# Altium PCB ALLOCHIS_ADAPTER_panelizado.PcbDoc
Units mm, origin at the board's own origin, x right, y up, seen from the top; angles counter-clockwise.
Board outline 180.5 x 180.5 mm, 4 copper layers (Top Layer, VCC3V3, GND, Bottom Layer), stack 1.579 mm thick; 3 components, 0 nets, 0 pads, 0 vias.
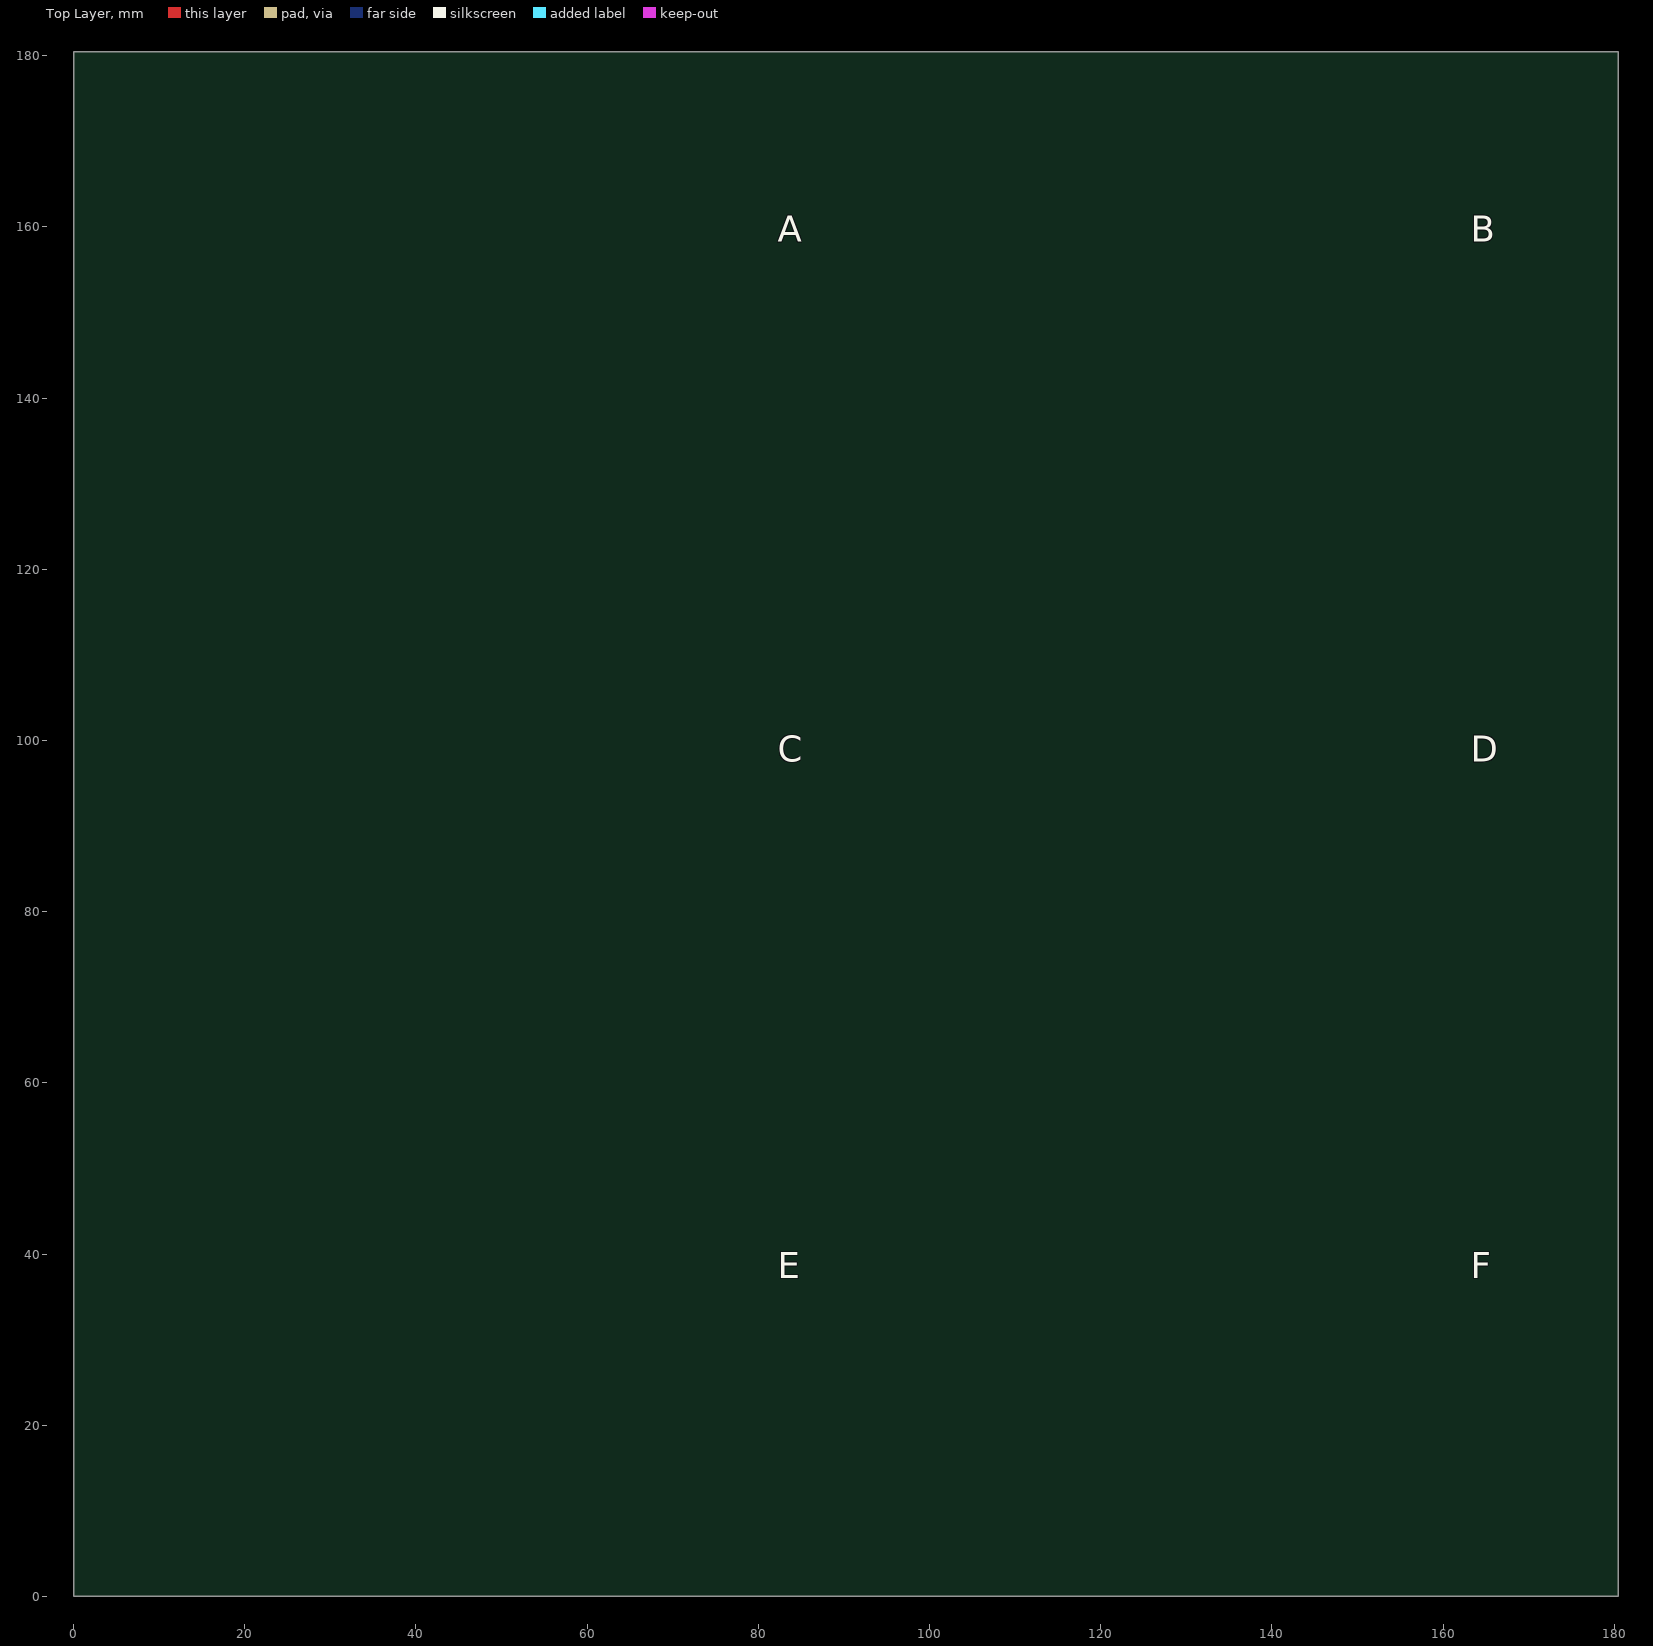
[diagram p0: Top Layer view]
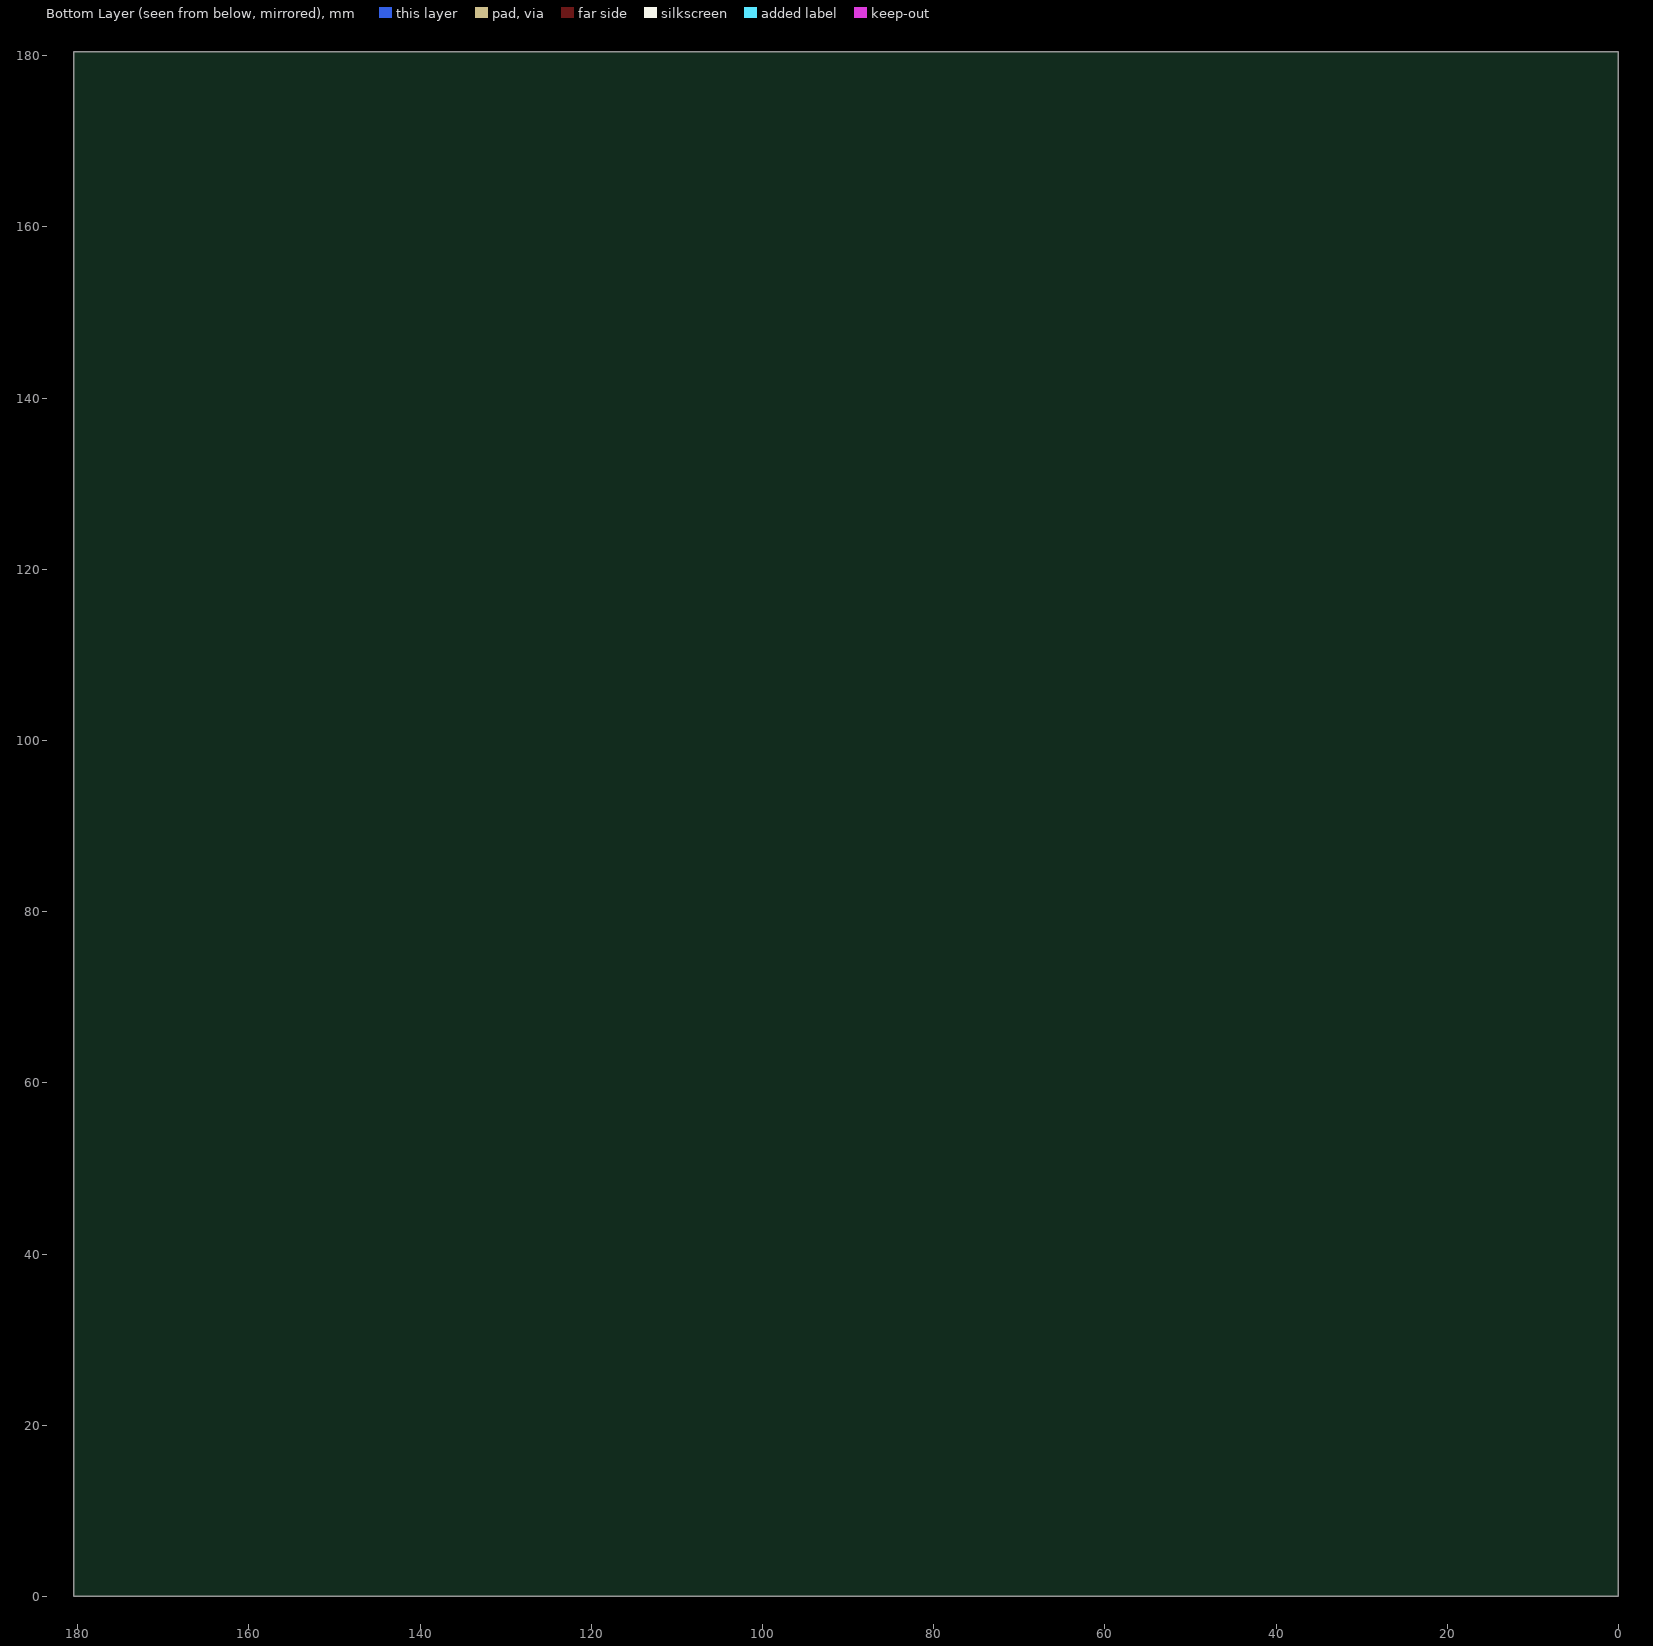
[diagram p1: Bottom Layer view, seen from below]
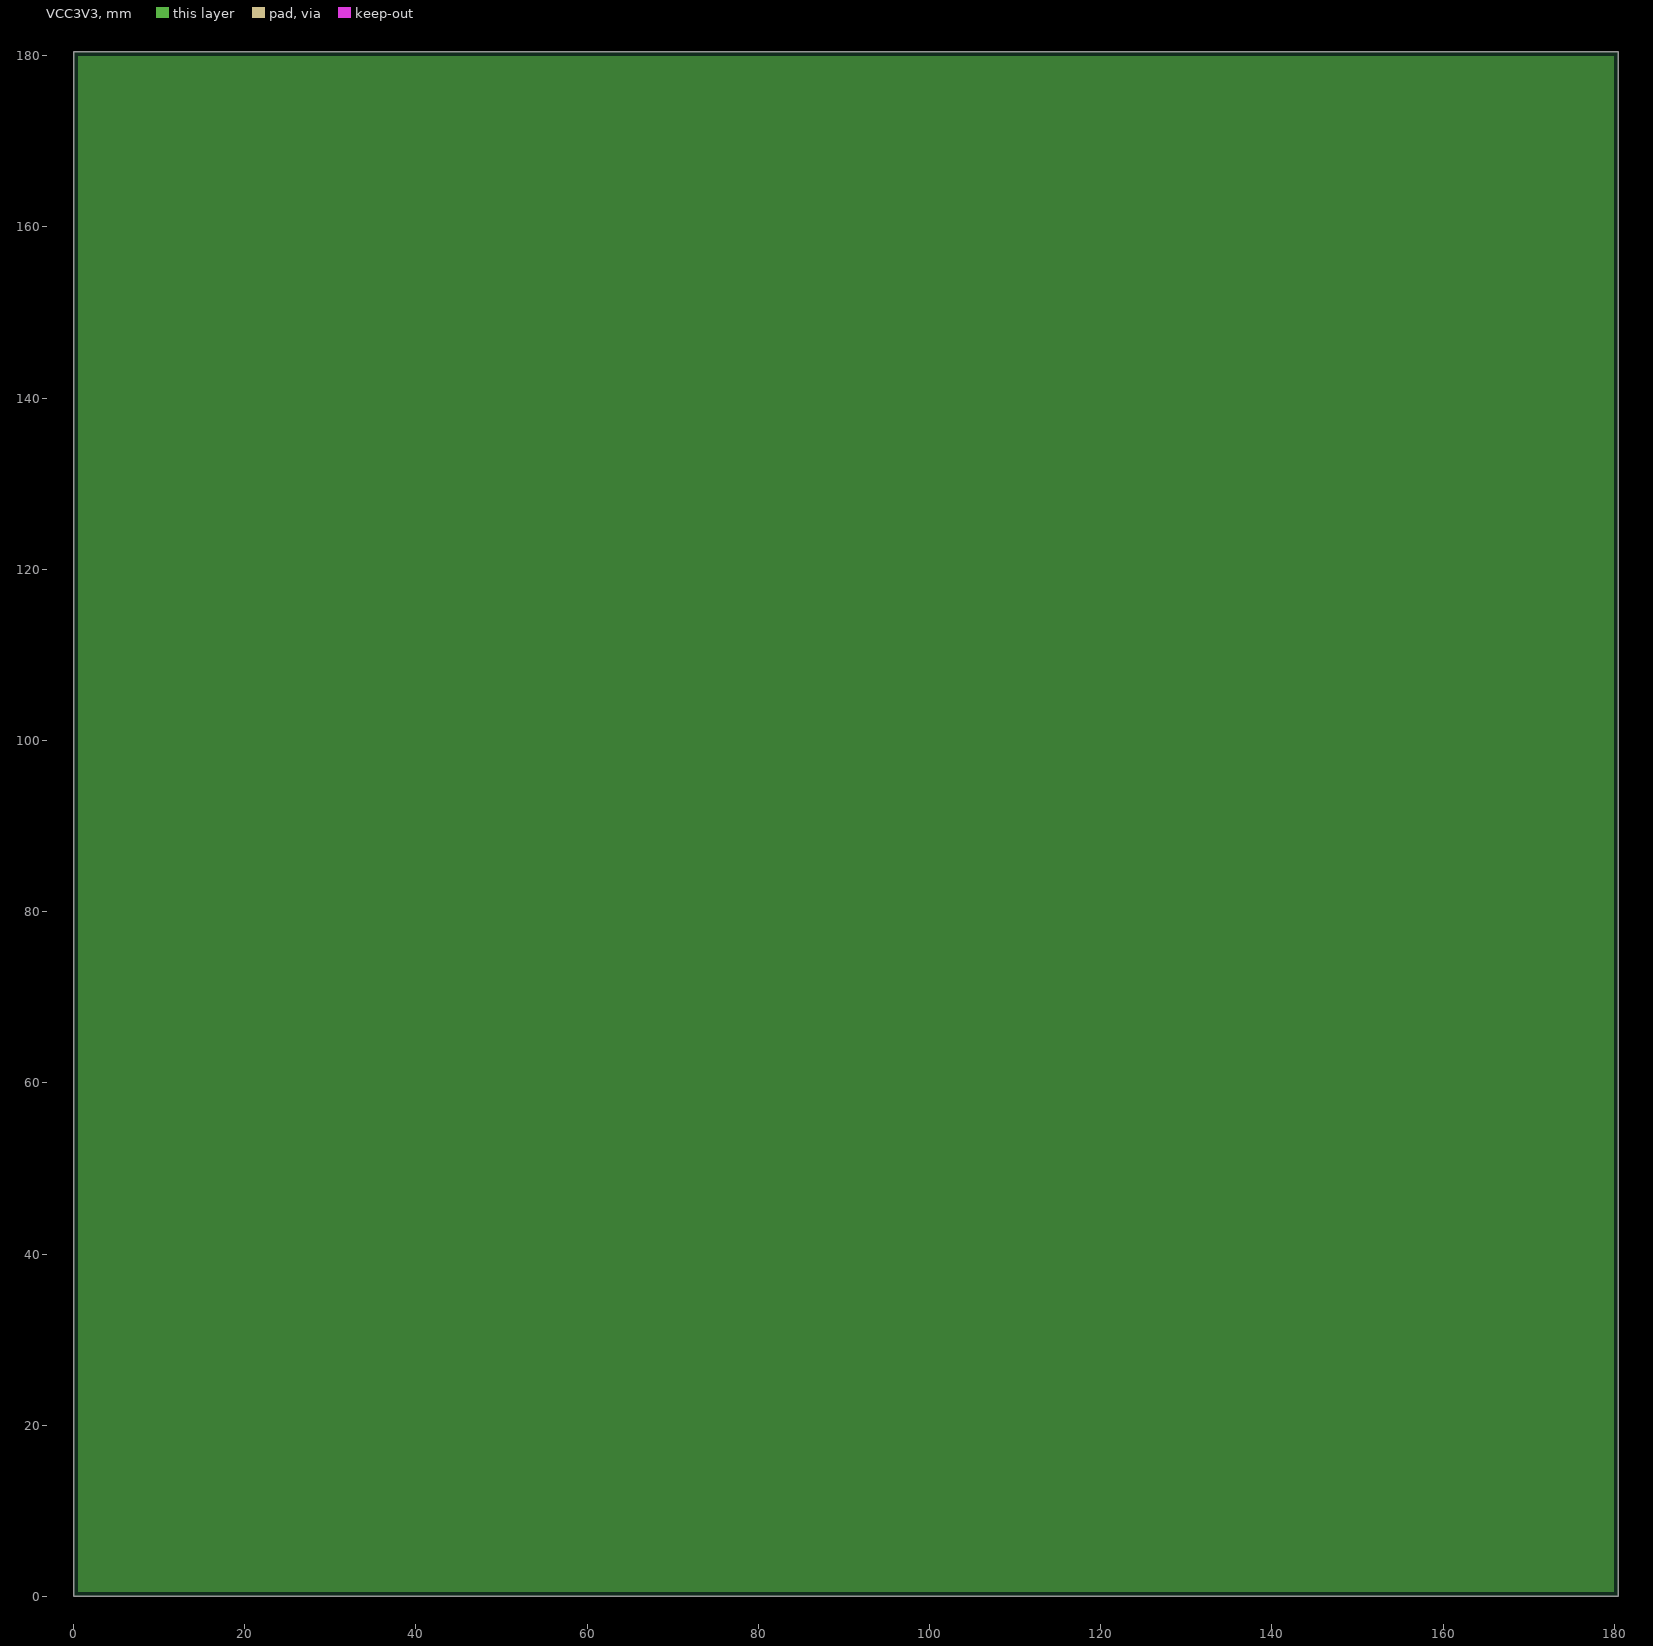
[diagram p2: VCC3V3, clearances drawn from the general rule]
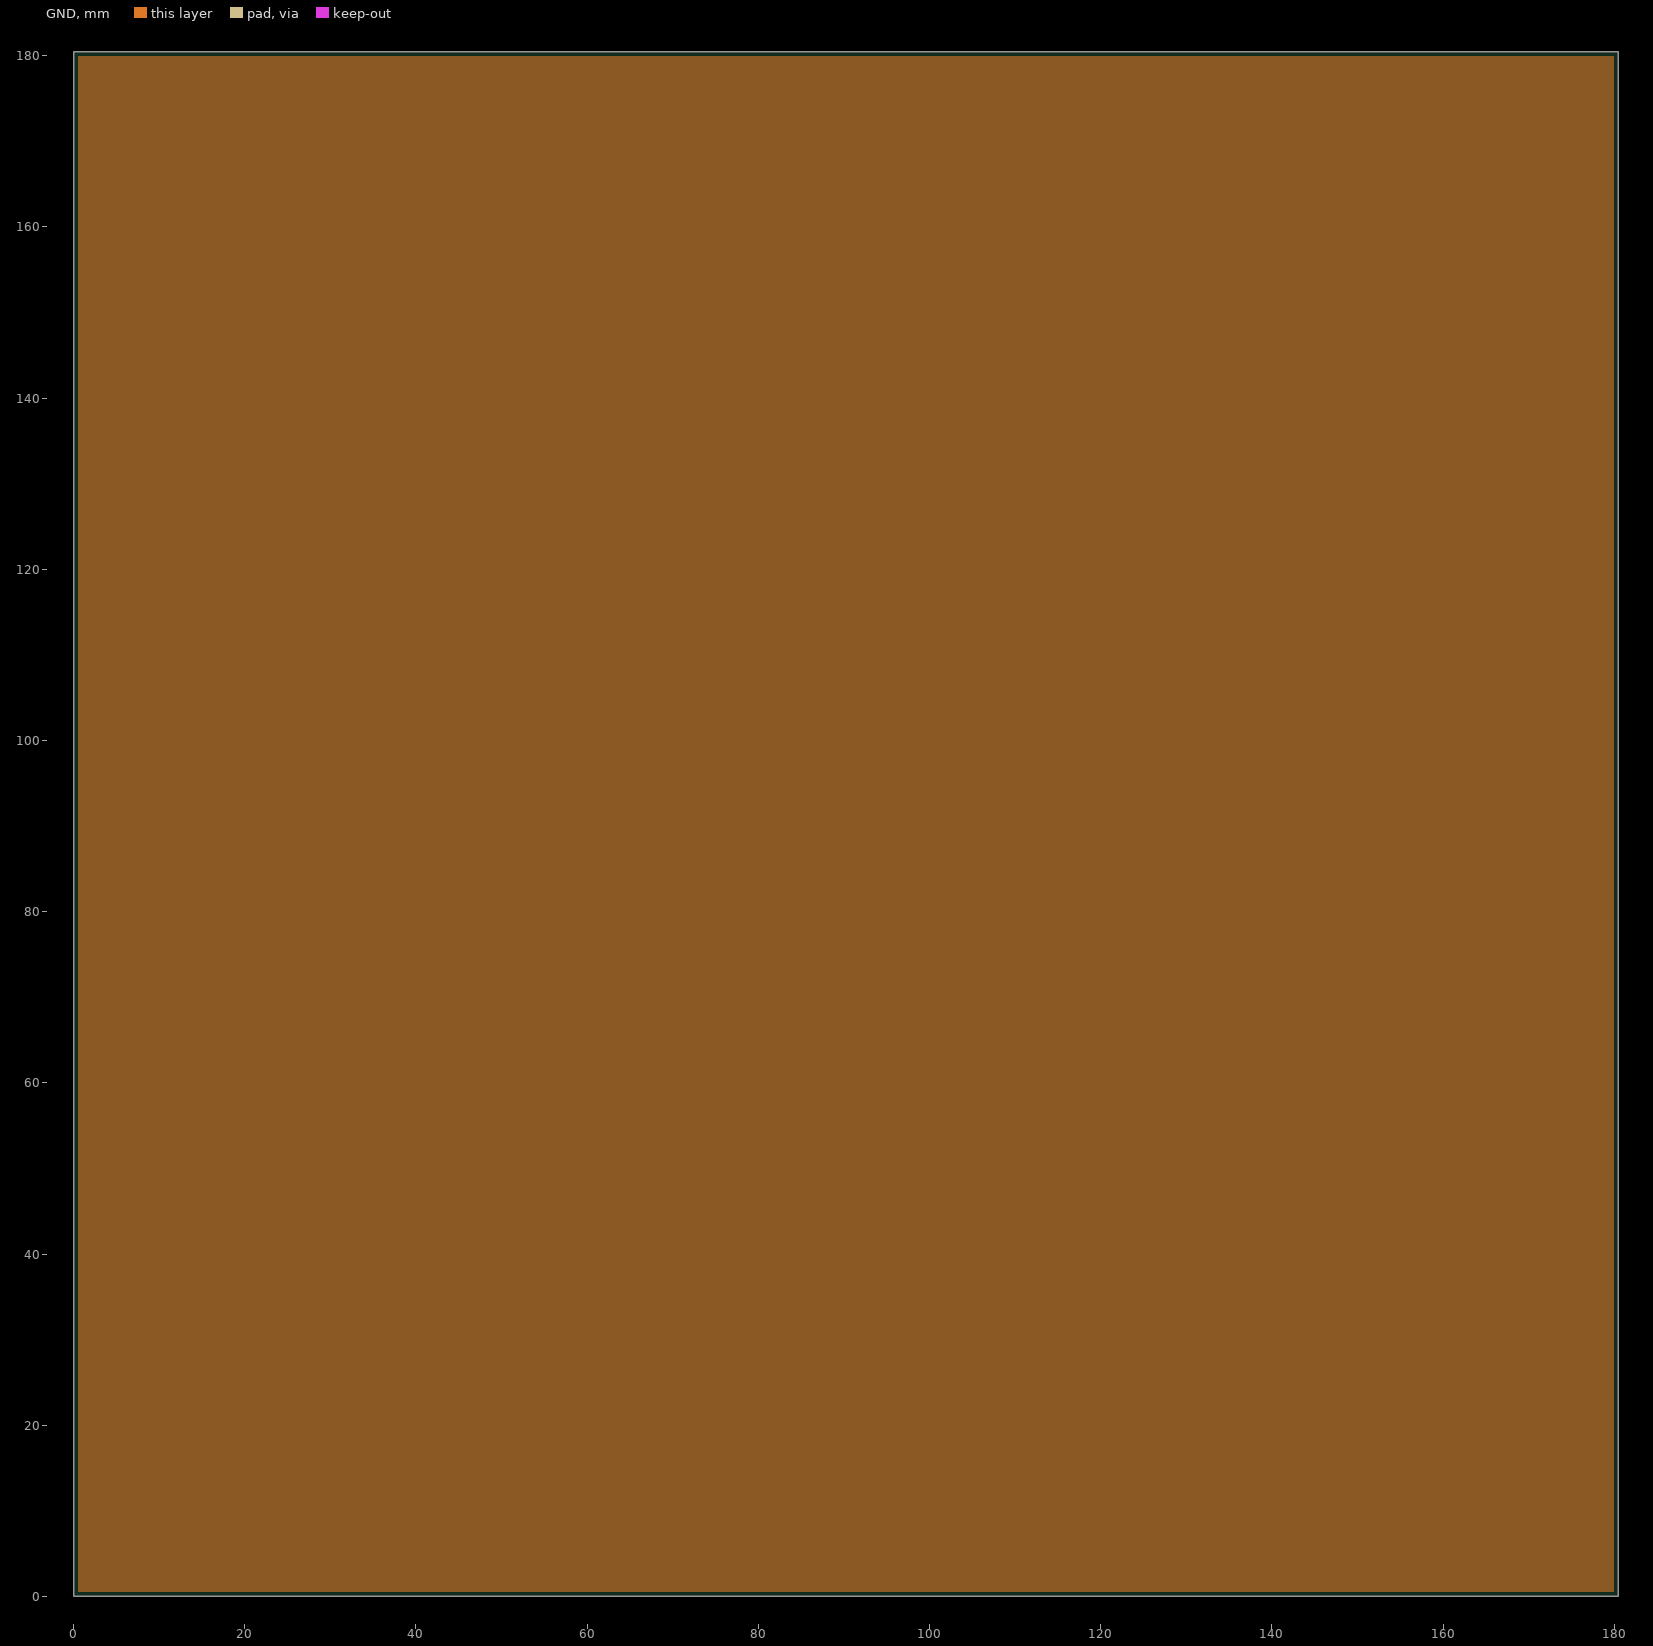
[diagram p3: GND, clearances drawn from the general rule]

## Layer stack, top to bottom
Top Solder: solder mask 0.0127, Solder Resist, Dk 3.5
Top Layer: signal copper 0.0347
Dielectric 1: prepreg 0.195, 7628, Dk 4.2
VCC3V3: plane copper 0.035
Dielectric 2: core 1.05, FR-4, Dk 4.2
GND: plane copper 0.035
Dielectric 3: prepreg 0.195, 7628, Dk 4.2
Bottom Layer: signal copper 0.0347
Bottom Solder: solder mask 0.0127, Solder Resist, Dk 3.5

## Board outline
0,0 0,180.5 180.5,180.5 180.5,0

## Design rules (kind name [scope] priority, off if disabled: settings)
Clearance [All] p1: gap=0.254 ignorepadtopadclearanceinfootprint=FALSE except(0: Arc-Hole Track-Hole SMDPad-Hole THPad-Hole Via-Hole Fill-Hole Poly-Hole Region-Hole Text-Hole)
PlaneClearance [All] p1: clearance=0.508
PlaneConnect [All] p1: planeconnectstyle=Relief reliefexpansion=0.508 reliefentries=4 reliefconductorwidth=0.254 reliefairgap=0.254
PolygonConnect [All] p1: connectstyle=Relief reliefconductorwidth=0.254 reliefentries=4 polygonreliefangle="90 Angle" airgapwidth=0.254
RoutingVias [All] p1: holewidth=0.711 width=1.27 viastyle="Through Hole" minholewidth=0.711 minwidth=1.27 maxholewidth=0.711 maxwidth=1.27
SolderMaskExpansion [All] p1: expansion=0.102
Width [All] p1: maxlimit=0.254 minlimit=0.254 preferedwidth=0.254
28 further rules are at their usual default settings.

## Components (designator, comment, footprint, x,y, rotation, side; value= is the part's Value field where it differs from the comment)
AssemblyNotes "AssemblyNotes" ASSNOTES -176.4,66.55 r0 top
"Fabrication Notes" "FabricationNotes" FABNOTES -176.4,249.775 r0 top
"Title Block" "FormatBlock_A2" FormatBlock_A2 -194.15,-134.35 r0 top

## Footprints (in the part's own frame and the unit in brackets; to place one, negate y for a bottom-side part, rotate by r counter-clockwise, add the part's x,y. Pads: shape width x height; smd on the part's side, far side on the other; paste and mask are expansions set on the pad)
ASSNOTES [mm]
FABNOTES [mm]
FormatBlock_A2 [mm]

## Part data
AssemblyNotes: "Assembly Notes", N1_Item1="ASSEMBLE THE BOARD ACCORDING TO THE REQUIREMENTS OF IPC-A-610.", N1_Item2="THIS ASSEMBLY CONTAINS ELECTROSTATIC DISCHARGE. (ESD) SENSITIVE DEVICES;  STATIC-FREE HANDLING IS REQUIRED PER IPC-A-610.", N1_Item3="DESIGNATIONS ARE FOR REFERENCE ONLY AND DO NOT APPEAR ON INDIVIDUAL PARTS.", N1_Item4="ORIENTATION OF POLARIZED COMPONENTS (E.G., POLARIZED CAPACITORS) ARE DENOTED BY A POARITY INDICATOR ON THE PCB OR BY THE MANUFACTURER'S DESCRIPTION. POLARITY IS IDENTIFIED ON THE PART.", N1_Item5="SOME OF THE COMPONENTS ARE NOT INSTALLED (DNP) - REFER TO THE BOM.", N1_Item6="THIS PCB SHALL BE ASSEMBLED T0 MEET EU RoHS REGULATIONS (DIRECTIVE 2002/95/EC OF THE EUROPEAN PARLIAMENT AND OF THE COUNCIL OF 27 JANUARY 2003 ON THE RESTRICTION OF THE USE OF CERTAIN HAZARDOUS SUBSTANCES IN ELECTRICAL AND ELECTRONIC EQUIPMENT).", N1_Item7="COMPONENTS USED TO ASSEMBLE THIS PCB MUST WITHSTAND THE HIGHER TEMPERATURE REQUIREMENTS OF A RoHS ASSEMBLY PROCESS.", N1_Item8="REFERENCE DRAWINGS: ENSURE LATEST REVISION."
"Fabrication Notes": "Fabrication Notes", N2_Item1="FABRICATE BOARD IN ACCORDANCE WITH IPC-2221 CLASS 2, LEVEL B. OTHER APPLICABLE STANDARDS AND SPECIFICATIONS: IPC-A-22, IPC-T-50, IPC-L-109. INTERPRET ALL DIMENSIONS IN ACCORDANCE WITH ANSI-Y14.5.", N2_Item2="PRODUCIBILITY: BOARD FABRICATOR HAS THE RESPONSIBILITY TO CONDUCT A REVIEW OF THE FILES AND/OR MEDIA FOR MANUFACTURABILITY IN THEIR PROCESS AND CONFORMANCE TO ALL APPLICABLE SPECIFICATIONS. PLANTIUM MUST BE ADVISED IN WRITING (IN ADVANCE OF CHANGES, REVISIONS OR CORRECTIONS MADE OR RECOMMENDATIONS TO ENSURE CONFORMANCE TOMANUFACTURE) OF ANY SPECIFIED STANDARDS, AND OF ANY SPECIFICATIONS THAT CANNOT BE MET.", N2_Item3="CORE MATERIAL: LAMINATE GLASS FIBER EPOXY, FLAME RETARDENT PER IPC-4101 TYPE GF 140 or 170 DEGREE Tg SIZE AND CONSTRUCTION IN ACCORDANCE WITH SECTION A-A. 1 OR 2 OZ COPPER ON EXTERNAL AND 1 OR 2 OZ ON INTERNAL LAYERS PLATED.", N2_Item4="BONDING MATERIAL: PREPREG (B-STAGE) TYPE GF PER IPC-4101.", N2_Item5="APPLY FABRICATION ID AND/OR LOGO, UL MARKING AND DATE CODE, 4 DIGITS WEEK/YEAR IN SILKSCREEN ONLY IN CLEAR AREA OF THE BOARD, AT LEAST 50MILS AWAY FROM ANY FEATURE, ON EITHER THE PRIMARY OR SECONDARY SIDE OF PCB.", N2_Item6="BOARD CONSTRUCTION: SOLDER MASK OVER BARE COPPER (SMOBC) USING LIQUID PHOTOIMAGEABLE MATERIAL (LPI). APPLY TO BOTH EXTERNAL LAYERS IN ACCORDANCE WITH IPC-SM-840. USE APPROPRIATE SOLDER MASK ARTWORK FOR EACH SIDE OF BOARD.", N2_Item7="SOLDER MASK MISREGISTRATION SHALL NOT EXCEED +/-0.002 INCH. SOLDER MASK OVERLAP IS PERMITTED ON ALL CIRCULAR LANDS BUT SHALL NOT EXCEED 0.001 IN. NO SOLDER MASK MATERIAL PERMISSIBLE ON SMD LAND PATTERNS.", N2_Item8="SOLDER MASK THICKNESS 0.0004 IN. MIN. / 0.002 IN. MAX LPI SOLDER MASK MATERIAL IS TO BE DARK GREEN IN COLOR GLOSS FINISH AND HIGHLY TRANSPARENT.", N2_Item9="DRILL BOARDS USING N/C DRILL DATA AND HOLE SCHEDULE ON FABRICATION DRAWING. NO BREAKOUT PERMISSIBLE.", N2_Item10="ALL HOLES ARE PLATED-THROUGH UNLESS OTHERWISE NOTED. MINIMUM COPPER PLATING IN PLATED HOLES TO BE 0.001 INCH.", N2_Item11="MINIMUM ANNULAR RING 0.006 IN. NO BREAKOUT PERMISSIBLE.", N2_Item12="PCB FINISH IS ELECTROLESS NICKEL IMMERSION GOLD (ENIG).", N2_Item13="FINISHED LINE WIDTH TOLERANCE IS +/- 20%.", N2_Item14="MINIMUM FINISHED SPACING TO BE 0.005 IN.", N2_Item15="DIMENSIONS ARE AFTER ETCHING AND PLATING AND ARE BASIC UNLESS OTHERWISE NOTED. TOLERANCES ARE NON-CUMULATIVE.", N2_Item16="BOW AND TWIST SHALL NOT EXCEED 0.75%.", N2_Item17="SILKSCREEN TOP SIDE OF BOARD USING NON-CONDUCTIVE, WHITE EPOXY BASE INK. USE APPROPRIATE ARTWORK FOR EACH SIDE.", N2_Item18="LAYER TO LAYER REGISTRATION TO BE +/- 0.005 INCH NON-CUMULATIVE.", N2_Item19="LAYER CONFIGURATION: SEE DETAIL A-A ; FINISHED BOARD THICKNESS: SEE DETAIL A-A.", N2_Item20="FINISHED BOARD TO CONFORM TO IPC-A-600.", N2_Item21="ALL FILM (ARTWORK) EITHER PROVIDED BY PLANTIUM OR GENERATED BY VENDOR ARE TO BE DELIVERED WITH FINISHED BOARDS.", N2_Item22="ELECTRICAL TEST: ALL BOARDS SHALL BE 100% ELECTRICALLY TESTED FOR OPENS (GREATER THAN 1 OHM) WITH A TEST CURRENT OF 0.01 AMPS. SHORTS (LESS THAN 1 MEGOHMS) WITH A TEST VOLTAGE OF 10.0 VOLTS.", N2_Item23="VENDOR WILL PROVIDE APPROPRIATE QUALITY COMPLIANCE.", N2_Item24="DESIGNED IN FABRICATION ALLOWANCE IS 0.001 INCH.", N2_Item25="THE FIDUCIALS SHOULD BE VISIBLE ON THE PASTE SCREEN.", N2_Item26="THIS IS A NOT CONTROLLED IMPEDANCE PCB:  CAN lines, etc, trace length < 2000 mils, USB components not populated", N2_Item27="CAN ALTER INIDIVIDIAL LAYER THICKNESS. ENSURE PCB BALANCE AND FINISHED PCB DIMINSION AS INDICATED.", N2_Item28="STENCIL THICKNESS IS 4 MILS."
"Title Block": "Fill this block's parameters to complete the text shown in the PCB file (Title Block)", PartNumber=10113AAB001, Approved=GS, Drawn=LE, HW_Version=0.0.1, ProjectTitle="ADAPTER BOARD", RevDate=16-Jun-23, RevDescription="Baby Board - ALLOCHIS isoBUS"

## Nets (pads, with @x,y where several pads share a name; then routed paths per layer and width w, separated by ;. In a path a pad name is that pad's centre, name@x,y a point inside that pad or via, vN(x,y) a via of type N, cw(c..) or ccw(c..) an arc to the next point about the centre after c; other vN are vias at no path point)

## Polygon pours and split planes (outlines as drawn)
no net on VCC3V3 (split plane): 179.99,0.51 0.51,0.51 0.51,179.99 179.99,179.99
no net on GND (split plane): 179.99,0.51 0.51,0.51 0.51,179.99 179.99,179.99

## Silkscreen, mask and mechanical layers (free items; w line width, h text height)
Top Overlay:
  text "A" at 82.25,158.25 h3.05
  text "B" at 163.25,158.25 h3.05
  text "C" at 82.25,97.55 h3.05
  text "D" at 163.25,97.55 h3.05
  text "E" at 82.25,37.15 h3.05
  text "F" at 163.25,37.15 h3.05
Mechanical 11:
  drawing of 295 lines, arcs and shapes, not listed
  text "Layer" at 54.478,250.381 h1.52
  text "Name" at 64.89,250.381 h1.52
  text "Material" at 88.506,250.381 h1.52
  text "Thickness" at 110.344,250.381 h1.52
  text "Constant" at 126.85,250.381 h1.52
  text "Board Layer Stack" at 141.324,250.381 h1.52
  text "1" at 54.478,247.333 h1.52
  text "Top Overlay" at 64.89,247.333 h1.52
  text "2" at 54.478,244.285 h1.52
  text "Top Solder" at 64.89,244.285 h1.52
  text "Solder Resist" at 88.506,244.285 h1.52
  text "0.013mm" at 110.344,244.285 h1.52
  text "3.5" at 126.85,244.285 h1.52
  text "3" at 54.478,241.237 h1.52
  text "Top Layer" at 64.89,241.237 h1.52
  text "Copper" at 88.506,241.237 h1.52
  text "0.035mm" at 110.344,241.237 h1.52
  text "4" at 54.478,238.189 h1.52
  text "Dielectric 1" at 64.89,238.189 h1.52
  text "7628" at 88.506,238.189 h1.52
  text "0.195mm" at 110.344,238.189 h1.52
  text "4.2" at 126.85,238.189 h1.52
  text "5" at 54.478,235.141 h1.52
  text "VCC3V3" at 64.89,235.141 h1.52
  text "Copper" at 88.506,235.141 h1.52
  text "0.035mm" at 110.344,235.141 h1.52
  text "6" at 54.478,232.093 h1.52
  text "Dielectric 2" at 64.89,232.093 h1.52
  text "FR-4" at 88.506,232.093 h1.52
  text "1.050mm" at 110.344,232.093 h1.52
  text "4.2" at 126.85,232.093 h1.52
  text "7" at 54.478,229.045 h1.52
  text "GND" at 64.89,229.045 h1.52
  text "Copper" at 88.506,229.045 h1.52
  text "0.035mm" at 110.344,229.045 h1.52
  text "8" at 54.478,225.997 h1.52
  text "Dielectric 3" at 64.89,225.997 h1.52
  text "7628" at 88.506,225.997 h1.52
  text "0.195mm" at 110.344,225.997 h1.52
  text "4.2" at 126.85,225.997 h1.52
  text "9" at 54.478,222.949 h1.52
  text "Bottom Layer" at 64.89,222.949 h1.52
  text "Copper" at 88.506,222.949 h1.52
  text "0.035mm" at 110.344,222.949 h1.52
  text "10" at 54.478,219.901 h1.52
  text "Bottom Solder" at 64.89,219.901 h1.52
  text "Solder Resist" at 88.506,219.901 h1.52
  text "0.013mm" at 110.344,219.901 h1.52
  text "3.5" at 126.85,219.901 h1.52
  text "11" at 54.478,216.853 h1.52
  text "Bottom Overlay" at 64.89,216.853 h1.52
Drill Drawing:
  circle w0.254: c297.844,227.662 r0.847
  lines w0.254: 296.997,203.955 296.997,204.378 297.421,204.802 296.997,205.225 296.997,205.648 297.421,205.648 297.844,205.225 298.267,205.648 298.691,205.648 298.691,205.225 298.267,204.802 298.691,204.378 298.691,203.955 298.267,203.955 297.844,204.378 297.421,203.955 296.997,203.955 ; 296.997,208.612 297.844,207.765 298.691,208.612 297.844,209.458 296.997,208.612 ; 296.997,211.998 297.421,211.998 297.421,211.575 298.267,211.575 298.267,211.998 298.691,211.998 298.691,212.845 298.267,212.845 298.267,213.268 297.421,213.268 297.421,212.845 296.997,212.845 296.997,211.998 ; 296.997,217.078 298.691,217.078 297.844,215.385 296.997,217.078 ; 296.997,219.195 298.691,219.195 298.691,220.888 296.997,220.888 296.997,219.195 ; 296.997,223.005 297.844,223.428 298.691,223.005 298.267,223.852 298.691,224.698 297.844,224.275 296.997,224.698 297.421,223.852 296.997,223.005
  lines w0.381: 295.479,202.812 367.139,202.812 ; 295.479,229.482 367.139,229.482 ; 309.471,199.002 309.471,233.292 ; 324.707,199.002 324.707,233.292 ; 353.147,199.002 353.147,233.292 ; 295.479,199.002 367.139,199.002 367.139,233.292 295.479,233.292 295.479,199.002
  text "Symbol" at 297.765,230.625 h1.83
  text "Count" at 310.614,230.625 h1.83
  text "Hole Size" at 325.85,230.625 h1.83
  text "Plated" at 354.29,230.625 h1.83
  text "6" at 310.614,226.815 h1.52
  text "0.800mm (31.50mil)" at 325.85,226.815 h1.52
  text "NPTH" at 354.29,226.815 h1.52
  text "6" at 310.614,223.005 h1.52
  text "1.700mm (66.93mil)" at 325.85,223.005 h1.52
  text "NPTH" at 354.29,223.005 h1.52
  text "12" at 310.614,219.195 h1.52
  text "1.200mm (47.24mil)" at 325.85,219.195 h1.52
  text "NPTH" at 354.29,219.195 h1.52
  text "12" at 310.614,215.385 h1.52
  text "3.000mm (118.11mil)" at 325.85,215.385 h1.52
  text "NPTH" at 354.29,215.385 h1.52
  text "24" at 310.614,211.575 h1.52
  text "0.900mm (35.43mil)" at 325.85,211.575 h1.52
  text "PTH" at 354.29,211.575 h1.52
  text "24" at 310.614,207.765 h1.52
  text "3.000mm (118.11mil)" at 325.85,207.765 h1.52
  text "PTH" at 354.29,207.765 h1.52
  text "522" at 310.614,203.955 h1.52
  text "0.254mm (10.00mil)" at 325.85,203.955 h1.52
  text "PTH" at 354.29,203.955 h1.52
  text "606 Total" at 310.614,200.145 h1.52
Mechanical 25 (Mech25):
  the board outline again, w0.254
V-Scoring:
  lines w0.254: 0,60.255 180.5,60.25 ; 0,120.75 180.5,120.75 ; 9.75,0 9.75,180.5 ; 90.25,0 90.25,180.5 ; 170.75,0 170.75,180.5

## Dimensions
0,0 to 180.5,0 on Mechanical 16
0,0 to 0,180.5 on Mechanical 16
180.5,120.75 to 192.946,120.623 on Mechanical 11
180.5,60.25 to 192.946,60.123 on Mechanical 11
170.75,180.5 to 170.877,192.946 on Mechanical 11
9.75,180.5 to 9.877,192.946 on Mechanical 11
90.25,180.5 to 90.377,192.946 on Mechanical 11

## Panel: embedded boards
"ALLOCHIS_ADAPTER_v1.0.PcbDoc" at 10,0, 3 rows x 2 columns, spacing 60.5 x 80.5, rotation 0

## Text inside footprints (layer, text, board x,y; h text height)
AssemblyNotes: Mechanical 29 "8." at -181.838,26.778 h1.25; Mechanical 29 "7." at -181.838,31.808 h1.25; Mechanical 29 "3." at -181.5,52.75 h1.25; Mechanical 29 "6." at -181.584,39.323 h1.25; Mechanical 29 "5." at -181.584,42.881 h1.25; Mechanical 29 "4." at -181.584,49.408 h1.25; Mechanical 29 "1." at -181.33,60.186 h1.25; Mechanical 29 "2." at -181.584,57.474 h1.25; Mechanical 29 "ASSEMBLY NOTES:" at -180.343,66.101 h1.25
"Fabrication Notes": Mechanical 28 "28." at -182.593,77.538 h1.25; Mechanical 28 "25." at -182.593,91.773 h1.25; Mechanical 28 "22." at -182.593,109.794 h1.25; Mechanical 28 "21." at -182.593,115.89 h1.25; Mechanical 28 "20." at -182.593,120.258 h1.25; Mechanical 28 "19." at -182.593,126.354 h1.25; Mechanical 28 "7." at -182.593,193.106 h1.25; Mechanical 28 "6." at -182.593,201.437 h1.25; Mechanical 28 "5." at -182.593,209.666 h1.25; Mechanical 28 "27." at -182.593,82.75 h1.25; Mechanical 28 "26." at -182.593,88.213 h1.25; Mechanical 28 "23." at -182.593,100.557 h1.25; Mechanical 28 "24." at -182.593,96.036 h1.25; Mechanical 28 "18." at -182.593,130.622 h1.25; Mechanical 28 "17." at -182.593,136.718 h1.25; Mechanical 28 "15." at -182.593,149.418 h1.25; Mechanical 28 "13." at -182.593,157.546 h1.25; Mechanical 28 "14." at -182.593,153.482 h1.25; Mechanical 28 "11." at -182.593,165.978 h1.25; Mechanical 28 "12." at -182.593,161.914 h1.25; Mechanical 28 "10." at -182.593,172.278 h1.25; Mechanical 28 "9." at -182.593,178.374 h1.25; Mechanical 28 "8." at -182.593,184.774 h1.25; Mechanical 28 "4." at -182.593,213.934 h1.25; Mechanical 28 "3." at -182.593,222.265 h1.25; Mechanical 28 "2." at -182.593,234.965 h1.25; Mechanical 28 "1." at -182.593,243.297 h1.25; Mechanical 28 "16." at -182.593,143.118 h1.25; Mechanical 28 "FABRICATION NOTES:" at -180.372,249.214 h1.25
"Title Block": Mechanical 13 "A" at -198.157,246.44 h2; Mechanical 13 "C" at -198.257,127.286 h2; Mechanical 13 "B" at -198.033,186.178 h2; Mechanical 13 "D" at -198.033,69.033 h2; Mechanical 13 "1" at 356.611,277.027 h2; Mechanical 13 "2" at 299.835,276.979 h2; Mechanical 13 "E" at -198.133,11.033 h2; Mechanical 13 "F" at -198.133,-45.367 h2; Mechanical 13 "G" at -198.033,-107.667 h2; Mechanical 13 "G" at 389.39,-107.667 h2; Mechanical 13 "F" at 389.29,-45.367 h2; Mechanical 13 "E" at 389.29,11.033 h2; Mechanical 13 "D" at 389.39,69.033 h2; Mechanical 13 "B" at 389.39,186.178 h2; Mechanical 13 "C" at 389.166,127.286 h2; Mechanical 13 "A" at 389.266,246.44 h2; Mechanical 13 "4" at 182.611,277.027 h2; Mechanical 13 "5" at 124.611,277.027 h2; Mechanical 13 "6" at 66.611,277.027 h2; Mechanical 13 "7" at 8.611,277.027 h2; Mechanical 13 "8" at -49.389,277.027 h2; Mechanical 13 "9" at -107.389,277.027 h2; Mechanical 13 "3" at 240.611,277.027 h2; Mechanical 13 "10" at -165.55,277.05 h2; Mechanical 13 "10" at -165.55,-137.621 h2; Mechanical 13 "3" at 240.611,-137.621 h2; Mechanical 13 "9" at -107.95,-137.65 h2; Mechanical 13 "8" at -49.389,-137.621 h2; Mechanical 13 "7" at 8.611,-137.621 h2; Mechanical 13 "6" at 66.611,-137.621 h2; Mechanical 13 "5" at 124.611,-137.621 h2; Mechanical 13 "4" at 182.611,-137.621 h2; Mechanical 13 "2" at 298.65,-137.65 h2; Mechanical 13 "1" at 356.611,-137.621 h2; Mechanical 25 "DRAWN" at 352.315,267.065 h1.23; Mechanical 25 "DATE" at 376.445,267.065 h1.23; Mechanical 25 "APPROVED" at 360.951,267.065 h1.2; Mechanical 25 "DESCRIPTION" at 331.233,267.065 h1.23; Mechanical 25 "VERSION" at 313.763,266.966 h1.14; Mechanical 25 "REVISIONS HISTORY" at 339.993,271.777 h1.4; Mechanical 25 "(SEE NOTES)" at 276.369,-130.35 h2.03; Mechanical 25 "(SEE NOTES)" at 276.369,-119.35 h2.03; Mechanical 25 "DATE" at 239.358,-94.055 h1.2; Mechanical 25 "DATE" at 239.358,-85.114 h1.27; Mechanical 25 "DRAWN" at 215.863,-85.216 h1.27; Mechanical 25 "APPROVED" at 215.812,-94.207 h1.27; Mechanical 25 "USED FOR MANUFACTURING  OR  FOR ANY" at 217.87,-124.255 h1.27; Mechanical 25 "PROPRIETARY INFORMATION" at 221.197,-106.247 h1.78; Mechanical 25 "INFORMATION  WHICH  SHALL  NOT  BE" at 217.743,-114.324 h1.27; Mechanical 25 "THIS DOCUMENT CONTAINS PROPRIETARY" at 217.743,-111.124 h1.27; Mechanical 25 "DOCUMENTS OR DISCLOSED TO OTHERS OR" at 217.92,-121.03 h1.27; Mechanical 25 "PERMISSION OF PLANTIUM." at 217.87,-131.088 h1.27; Mechanical 25 "REPRODUCED OR TRANSFERRED TO OTHER" at 217.87,-117.702 h1.27; Mechanical 25 "OTHER PURPOSE WITHOUT THE PRIOR WRITTEN" at 217.793,-127.888 h1.27; Mechanical 25 "VERSION" at 375.993,-119.618 h1.2; Mechanical 25 "FILENAME:" at 309.818,-129.513 h1.2; Mechanical 25 "PART NUMBER" at 310.021,-119.506 h1.2; Mechanical 25 "FINISH:" at 264.455,-125.518 h1.66; Mechanical 25 "MATERIAL:" at 264.455,-114.883 h1.66; Mechanical 25 "TITLE" at 309.919,-109.181 h1.66; Mechanical 25 "-DIMENSIONS ARE IN MILLIMETERS" at 263.644,-90.769 h1.66; Mechanical 25 "UNLESS OTHERWISE SPECIFIED:" at 263.324,-87.1 h1.65; Mechanical 25 "-REMOVE ALL BURRS & BREAK" at 263.644,-93.698 h1.66; Mechanical 25 "SHARP EDGES" at 264.071,-96.043 h1.66; Mechanical 25 "-TOLERANCE ON:" at 263.644,-98.597 h1.66; Mechanical 25 "DECIMALS:" at 265.808,-101.472 h1.66; Mechanical 25 "XXX .005" at 265.808,-110.258 h1.66; Mechanical 25 "XX .01" at 265.808,-107.484 h1.66; Mechanical 25 "ANGLES:" at 296.476,-101.472 h1.66; Mechanical 25 "FRACTIONS:" at 280.603,-101.627 h1.66; Mechanical 25 "1/64" at 281.528,-104.864 h1.66; Mechanical 25 "X .02" at 265.808,-104.709 h1.66; Mechanical 25 "63" at 298.484,-108.101 h1.66; Mechanical 25 "1" at 299.871,-104.864 h1.66; Mechanical 25 "1" at 299.871,-104.864 h1.66; Mechanical 25 "Villa Constitucion, Santa Fe, CP 2919" at 310.62,-102.106 h1.94; Mechanical 25 "PHONE (03400) 47-4199" at 310.62,-105.531 h1.94; Mechanical 25 "PLANTIUM" at 341.127,-91.086 h2.54; Mechanical 25 "San Luis 279" at 310.714,-98.757 h1.94; Drill Guide "DRILL GUIDE" at 77.716,258.754 h6; Drill Guide "SHEET  3 OF 3" at 369.592,-132.15 h1.2; Drill Drawing "DRILL DRAWING" at 72.45,258.75 h6; Drill Drawing "SHEET  2 OF 3" at 369.591,-132.15 h1.2; Mechanical 20 "TOP ASSEMBLY DRAWING" at 57.389,258.754 h6; Mechanical 20 "2" at 381.581,-132.15 h1.2; Mechanical 22 "2" at -189.633,-132.15 h1.2; Mechanical 22 "BOTTOM ASSEMBLY DRAWING" at 168.508,258.754 h6; Mechanical 16 "PLANTIUM" at -148.629,-91.086 h2.54; Mechanical 16 "Villa Constitucion, Santa Fe, CP 2919" at -118.122,-102.106 h1.94; Mechanical 16 "San Luis 279" at -118.215,-98.757 h1.94; Mechanical 16 "PHONE (03400) 47-4199" at -118.122,-105.531 h1.94; Mechanical 16 "UNLESS OTHERWISE SPECIFIED:" at -70.826,-87.1 h1.65; Mechanical 16 "-DIMENSIONS ARE IN MILLIMETERS" at -71.146,-90.769 h1.66; Mechanical 16 "-REMOVE ALL BURRS & BREAK" at -71.146,-93.698 h1.66; Mechanical 16 "1" at -107.373,-104.864 h1.66; Mechanical 16 "1" at -107.373,-104.864 h1.66; Mechanical 16 "63" at -105.986,-108.101 h1.66; Mechanical 16 "X .02" at -73.309,-104.709 h1.66; Mechanical 16 "XX .01" at -73.309,-107.484 h1.66; Mechanical 16 "ANGLES:" at -103.978,-101.472 h1.66; Mechanical 16 "XXX .005" at -73.309,-110.258 h1.66; Mechanical 16 "DECIMALS:" at -73.309,-101.472 h1.66; Mechanical 16 "1/64" at -89.029,-104.864 h1.66; Mechanical 16 "FRACTIONS:" at -88.104,-101.627 h1.66; Mechanical 16 "SHARP EDGES" at -71.572,-96.043 h1.66; Mechanical 16 "-TOLERANCE ON:" at -71.146,-98.597 h1.66; Mechanical 16 "THIS DOCUMENT CONTAINS PROPRIETARY" at -25.244,-111.124 h1.27; Mechanical 16 "OTHER PURPOSE WITHOUT THE PRIOR WRITTEN" at -25.295,-127.888 h1.27; Mechanical 16 "PERMISSION OF PLANTIUM." at -25.371,-131.088 h1.27; Mechanical 16 "DOCUMENTS OR DISCLOSED TO OTHERS OR" at -25.422,-121.03 h1.27; Mechanical 16 "USED FOR MANUFACTURING  OR  FOR ANY" at -25.371,-124.255 h1.27; Mechanical 16 "INFORMATION  WHICH  SHALL  NOT  BE" at -25.244,-114.324 h1.27; Mechanical 16 "PROPRIETARY INFORMATION" at -28.699,-106.247 h1.78; Mechanical 16 "REPRODUCED OR TRANSFERRED TO OTHER" at -25.371,-117.702 h1.27; Mechanical 16 "(SEE NOTES)" at -83.871,-119.35 h2.03; Mechanical 16 "MATERIAL:" at -71.956,-114.883 h1.66; Mechanical 16 "FINISH:" at -71.956,-125.518 h1.66; Mechanical 16 "(SEE NOTES)" at -83.871,-130.35 h2.03; Mechanical 16 "FILENAME:" at -117.319,-129.513 h1.2; Mechanical 16 "PART NUMBER" at -117.523,-119.506 h1.2; Mechanical 16 "VERSION" at -183.494,-119.618 h1.2; Mechanical 16 "TITLE" at -117.421,-109.181 h1.66; Mechanical 16 "DATE" at -46.86,-85.114 h1.27; Mechanical 16 "DATE" at -46.86,-94.055 h1.2; Mechanical 16 "APPROVED" at -23.314,-94.207 h1.27; Mechanical 16 "DRAWN" at -23.365,-85.216 h1.27; Mechanical 16 "VERSION" at -120.998,266.712 h1.14; Mechanical 16 "DESCRIPTION" at -138.469,266.811 h1.23; Mechanical 16 "REVISIONS HISTORY" at -147.228,271.523 h1.4; Mechanical 16 "APPROVED" at -168.187,266.811 h1.2; Mechanical 16 "DRAWN" at -159.551,266.811 h1.23; Mechanical 16 "DATE" at -183.681,266.811 h1.23; Mechanical 14 "1" at -164.05,277.05 h2; Mechanical 14 "2" at -106.15,277.05 h2; Mechanical 14 "4" at 9.835,276.979 h2; Mechanical 14 "5" at 67.835,276.979 h2; Mechanical 14 "6" at 125.835,276.979 h2; Mechanical 14 "7" at 183.835,276.979 h2; Mechanical 14 "8" at 241.835,276.979 h2; Mechanical 14 "9" at 301.05,277.05 h2; Mechanical 14 "3" at -48.165,276.979 h2; Mechanical 14 "10" at 358.05,277.05 h2; Mechanical 14 "SHEET  2 OF" at -177.458,-132.15 h1.2; Mechanical 14 "D" at -196.746,69.033 h2; Mechanical 14 "B" at -196.746,186.18 h2; Mechanical 14 "C" at -196.746,127.278 h2; Mechanical 14 "A" at -196.646,246.44 h2; Mechanical 14 "E" at -196.846,11.033 h2; Mechanical 14 "F" at -196.846,-45.367 h2; Mechanical 14 "G" at -196.55,-107.65 h2; Mechanical 14 "G" at 390.873,-107.65 h2; Mechanical 14 "F" at 390.577,-45.367 h2; Mechanical 14 "E" at 390.577,11.033 h2; Mechanical 14 "A" at 390.777,246.44 h2; Mechanical 14 "C" at 390.677,127.278 h2; Mechanical 14 "B" at 390.677,186.18 h2; Mechanical 14 "D" at 390.677,69.033 h2; Mechanical 14 "10" at 358.15,-137.55 h2; Mechanical 14 "3" at -48.065,-137.621 h2; Mechanical 14 "9" at 299.935,-137.621 h2; Mechanical 14 "8" at 241.935,-137.621 h2; Mechanical 14 "7" at 183.935,-137.621 h2; Mechanical 14 "6" at 125.935,-137.621 h2; Mechanical 14 "5" at 67.935,-137.621 h2; Mechanical 14 "4" at 9.935,-137.621 h2; Mechanical 14 "2" at -106.75,-137.65 h2; Mechanical 14 "1" at -164.065,-137.621 h2; Mechanical 11 "LAMINATION DETAIL      Section A-A" at 75.808,258.627 h2.5; Mechanical 21 "3" at -189.633,-132.15 h1.2; Mechanical 24 "SHEET  1 OF" at 369.587,-132.15 h1.2; Mechanical 23 "3" at 381.581,-132.15 h1.2